# Altium PCB UARTRecorder2.PcbDoc
Units mm, origin at the board's own origin, x right, y up, seen from the top; angles counter-clockwise.
Board outline 152.4 x 101.6 mm, 2 copper layers (Top Layer, Bottom Layer); 66 components, 53 nets, 258 pads, 165 vias.
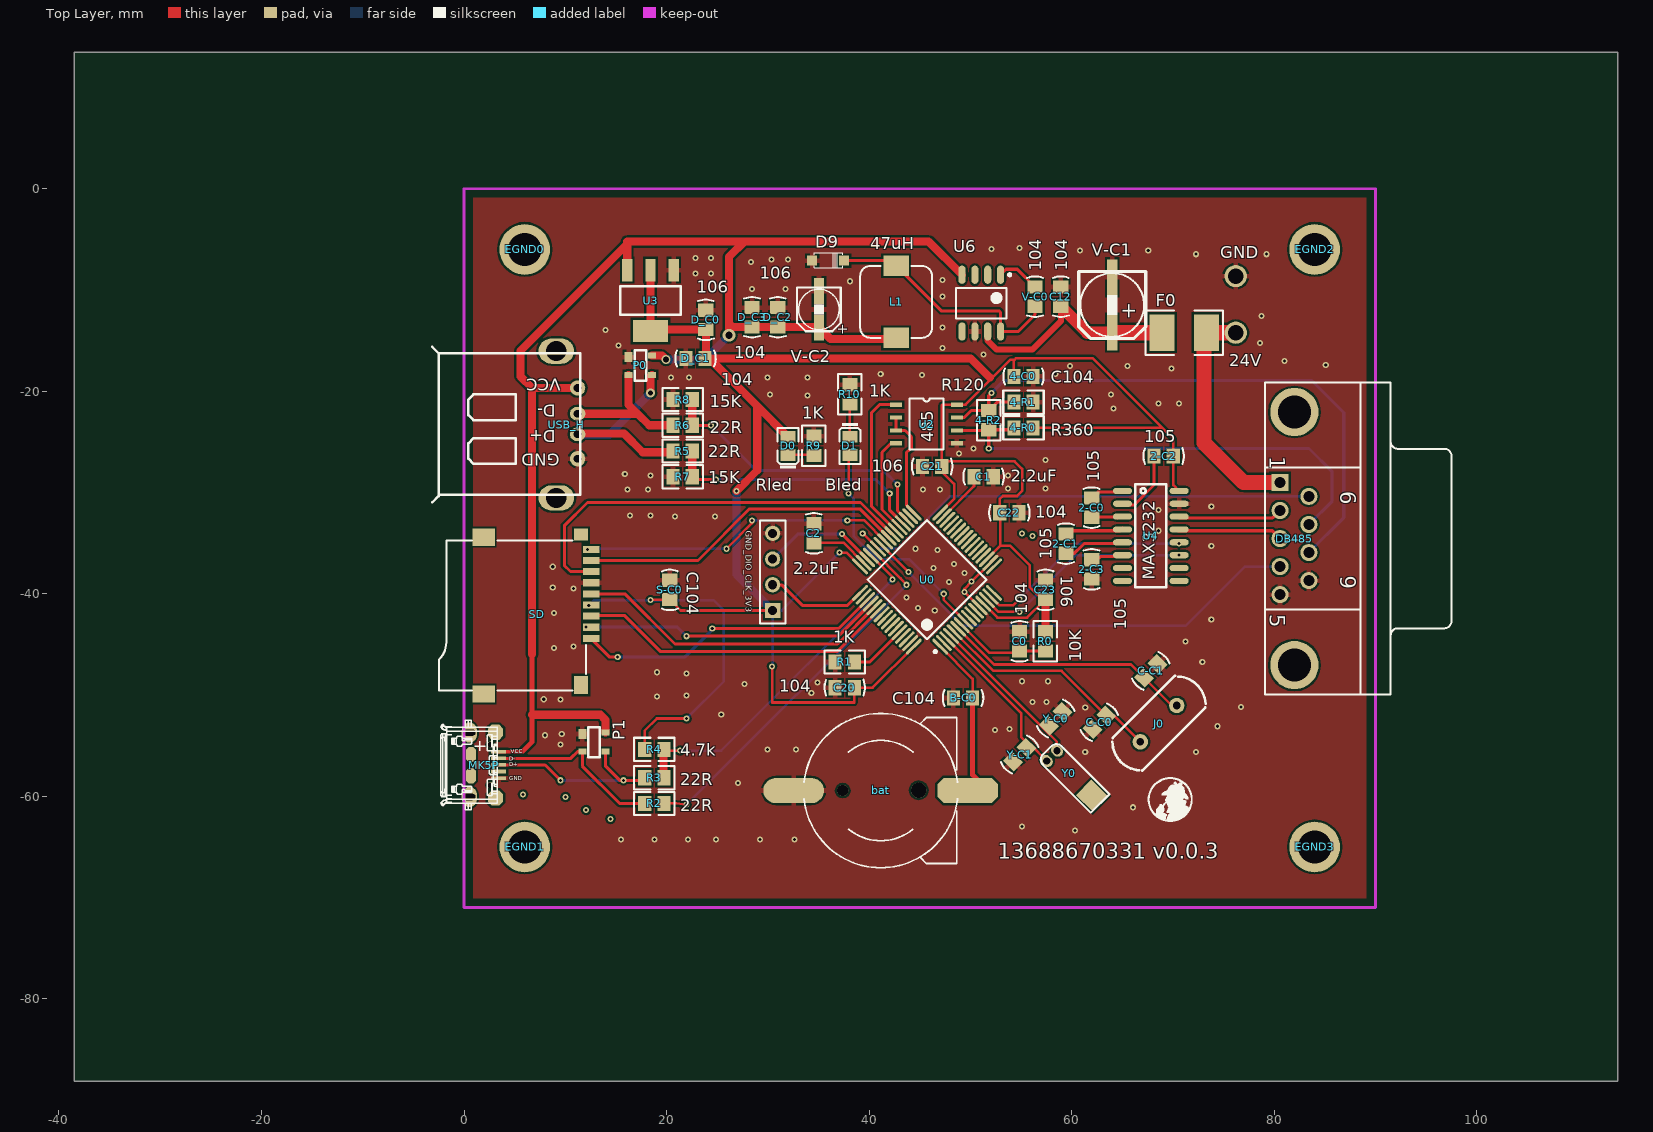
[diagram p0: Top Layer view]
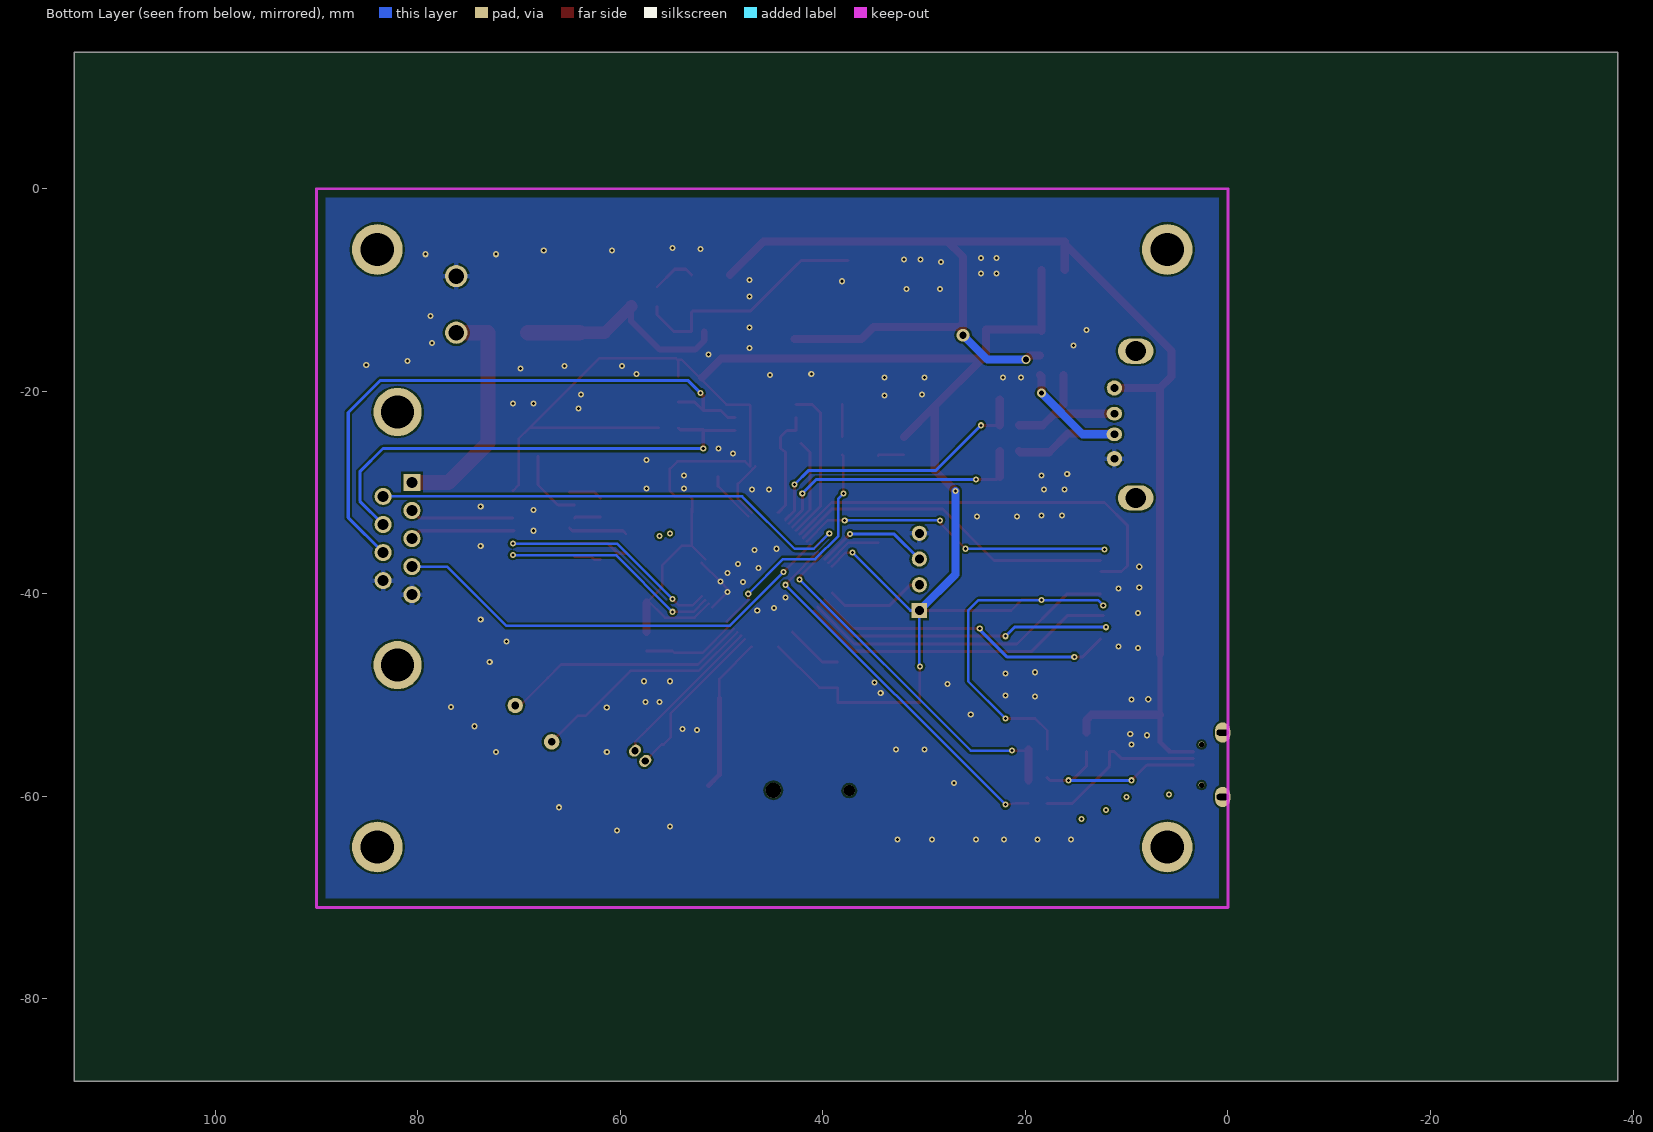
[diagram p1: Bottom Layer view, seen from below]

## Layer stack, top to bottom
Top Layer: signal copper 0.0356
Dielectric: dielectric 0.32, FR-4, Dk 4.8
Bottom Layer: signal copper 0.0356

## Board outline
-38.481,-88.13 113.919,-88.13 113.919,13.47 -38.481,13.47

## Design rules (kind name [scope] priority, off if disabled: settings)
Clearance Clearance_keepout [(OnLayer('Keep-Out Layer'))] p1: gap=0.762
Clearance Clearance_ploy [inpoly] p2: gap=0.203
Clearance [All] p3: gap=0.152
ComponentClearance [All] p1: gap=0.127 collisioncheckmode=3 verticalgap=0.254 showdistances=FALSE
DiffPairsRouting DiffPair_DiffPairsRouting [InDifferentialPair ('VOUT2')] p1: maxlimit=0.254 minlimit=0.254 mostfreqgap=0.254 maxuncoupledlength=12.7
DiffPairsRouting [All] p2: maxlimit=0.254 minlimit=-0.044 mostfreqgap=0.254 toplayer_maxgap=-0.044 toplayer_prefgap=3.693 bottomlayer_maxgap=-0.044 bottomlayer_prefgap=2.348 maxuncoupledlength=12.7
HoleSize [All] p1: absolutevalues=TRUE maxlimit=5 minlimit=0.025 maxpercent=80.000 minpercent=20.000
HoleSize FabricationTestpoint [All] p2: absolutevalues=TRUE maxlimit=2.54 minlimit=0.025 maxpercent=80.000 minpercent=20.000
HoleSize FabricationTestPointUsage [All] p3: absolutevalues=TRUE maxlimit=2.54 minlimit=0.025 maxpercent=80.000 minpercent=20.000
Length [All] p1: maxlimit=152.4 minlimit=0
MatchedLengths DiffPair_MatchedLengths [InDifferentialPair ('VOUT2')] p1: tolerance=25.4 checknetsindiffpair=TRUE checkdiffpairvsdiffpair=TRUE checkothers=TRUE
MinimumSolderMaskSliver [All] p1: minsoldermaskwidth=0
MinimumSolderMaskSliver SilkToSolderMaskClearance [IsPad] p2: minsoldermaskwidth=0.254
NetAntennae AssemblyTestpoint [All] p1: netantennaetolerance=0
NetAntennae [All] p2: netantennaetolerance=0
NetAntennae AssemblyTestPointUsage [All] p3: netantennaetolerance=0
NetAntennae UnpouredPolygon [All] p4: netantennaetolerance=0
NetAntennae SilkToBoardRegionClearance [All] p5: netantennaetolerance=0
PlaneConnect [All] p1: planeconnectstyle=Direct reliefexpansion=0.508 reliefentries=4 reliefconductorwidth=0.254 reliefairgap=0.254
PolygonConnect PolygonConnect_VIA [ISVIA] p1: connectstyle=Direct reliefconductorwidth=0.254 reliefentries=4 polygonreliefangle="90 Angle"
PolygonConnect [All] p2: connectstyle=Relief reliefconductorwidth=0.508 reliefentries=4 polygonreliefangle="90 Angle"
RoutingVias [All] p1: holewidth=0.4 width=0.8 viastyle="Through Hole" minholewidth=0.3 minwidth=0.6 maxholewidth=1 maxwidth=2
SilkToSilkClearance [All] p1: silktosilkclearance=0
SilkscreenOverComponentPads [All] p1: minsilkscreentomaskgap=0
SolderMaskExpansion [All] p1: expansion=0.102
TestPointUsage [All] p1: valid=0 allowmultiple=FALSE
Testpoint [All] p1: side=15 testpointundercomponent=TRUE minsize=1.016 maxsize=2.54 preferedsize=1.524 minholesize=0 maxholesize=1.016 preferedholesize=0.813 testpointgrid=0.025 style=1023 order=0-112345678
Width Width_VCC3.3 [InNet('G+3V3')] p1: maxlimit=20 minlimit=0.305 preferedwidth=0.305
Width DiffPair_Width [InDifferentialPair('VOUT2')] p2: maxlimit=0.254 minlimit=0.254 preferedwidth=0.254
Width [All] p3: maxlimit=2.54 minlimit=0.152 preferedwidth=0.203
16 further rules are at their usual default settings.

## Components (designator, comment, footprint, x,y, rotation, side; value= is the part's Value field where it differs from the comment)
2-C0 "105" C-RAD-0805 61.976,-31.488 r90 top
2-C1 "105" C-RAD-0805 59.436,-35.044 r90 top
2-C2 "105" C-RAD-0805 69.088,-26.408 r180 top
2-C3 "105" C-RAD-0805 61.976,-37.584 r90 top
4-C0 "C104" C-RAD-0805 55.245,-18.534 r180 top
4-R0 "R360" R2012-0805 55.245,-23.614 r180 top
4-R1 "R360" R2012-0805 55.245,-21.074 r180 top
4-R2 "R120" R2012-0805 51.816,-22.852 r90 top
24V "1孔" HOLEX1#1 76.2,-14.216 r0 top (schematic designator k0)
B-C0 "C104" C-RAD-0805 49.276,-50.284 r0 top
bat "Battery" BATM 41.148,-59.428 r90 top
C0 "104" C-RAD-0805 54.864,-44.696 r90 top
C1 "2.2uF" C-RAD-0805 51.308,-28.44 r0 top
C2 "2.2uF" C-RAD-0805 34.544,-34.028 r90 top
C12 "104" C-RAD-0805 58.928,-10.66 r90 top
C20 "104" C-RAD-0805 37.592,-49.268 r0 top
C21 "106" C-RAD-0805 46.228,-27.424 r0 top
C22 "104" C-RAD-0805 53.848,-31.996 r180 top
C23 "106" C-RAD-0805 57.404,-39.616 r270 top
C-C0 "22pF" C-RAD-0805 62.738,-52.697 r45 top
C-C1 "22pF" C-RAD-0805 67.818,-47.617 r225 top
D0 "Rled" 0805_LED_S1 32.004,-25.392 r90 top
D1 "Bled" 0805_LED_S1 38.1,-25.392 r270 top
D9 "S7" SOD123 36.576,-7.104 r0 top
D_C0 "106" C-RAD-0805 23.876,-12.946 r270 top
D_C1 "104" C-RAD-0805 22.86,-16.756 r0 top
D_C2 "106" C-RAD-0805 30.988,-12.692 r90 top
D_C3 "104" C-RAD-0805 28.448,-12.692 r90 top
DB485 "DB9母座" DB9-F 91.5,-34.544 r270 top
EGND0 "1孔" HOLEX1#2 6,-6 r90 top
EGND1 "1孔" HOLEX1#3 5.588,-62.857 r90 top
EGND2 "1孔" HOLEX1#2 84,-6 r90 top
EGND3 "1孔" HOLEX1#4 82.548,-62.857 r90 top
F0 "Fuse 1" 1812 71.12,-14.216 r180 top
GND "1孔" HOLEX1#1 76.2,-8.628 r0 top (schematic designator k1)
GND_DIO_CLK_3V3 "Header 4" HDR1X4 30.48,-41.648 r90 top
J0 "25M" 晶振HC-49S 68.58,-52.824 r225 top
L1 "47uH" L-SMD-7 42.672,-11.168 r270 top
MK5P "五脚端子" USB-MICRO1 3.072,-56.896 r90 top
P0 "PRTR5V0U2X" SOT-143 16.256,-16.629 r270 top
P1 "PRTR5V0U2X" SOT-143 11.684,-53.84 r270 top
R0 "10K" R2012-0805 57.404,-44.696 r270 top
R1 "1K" R2012-0805 37.592,-46.728 r180 top
R2 "22R" R2012-0805 18.796,-60.698 r180 top
R3 "22R" R2012-0805 18.796,-58.158 r180 top
R4 "4.7k" R2012-0805 18.796,-55.364 r180 top
R5 "22R" R2012-0805 21.59,-25.9 r180 top
R6 "22R" R2012-0805 21.59,-23.36 r180 top
R7 "15K" R2012-0805 21.59,-28.44 r180 top
R8 "15K" R2012-0805 21.59,-20.82 r180 top
R9 "1K" R2012-0805 34.544,-25.392 r270 top
R10 "1K" R2012-0805 38.1,-20.312 r270 top
S-C0 "C104" C-RAD-0805 20.32,-39.616 r90 top
SD "microSD" SDCARD-M 1.548,-42.156 r180 top locked
U0 "STM32F205RBT6" LQFP-64 45.72,-38.6 r135 top
U2 "485" SOP8 42.672,-21.328 r0 top
U3 "AMS1117-3.3" ? 18.415,-11.041 r90 top
U4 "MAX3232" SOP-16 65.024,-29.837 r270 top
U6 "LM2675M-5.0" "SOP8 - 3D" 51.054,-11.295 r270 top
USB_H "五脚端子" USB 11.216,-19.677 r180 top
V-C0 "104" C-RAD-0805 56.388,-10.66 r270 top
V-C1 "100uF/37V" SMD-EC-F6.3 64.008,-14.216 r90 top
V-C2 "47uF/37v" SMD-EC-F4 35.052,-13.708 r90 top
Y0 "32.768M" XTAL32 58.547,-55.491 r315 top
Y-C0 "20pF" C-RAD-0805 58.42,-52.316 r225 top
Y-C1 "20pF" C-RAD-0805 54.864,-55.872 r45 top

## Footprints (in the part's own frame and the unit in brackets; to place one, negate y for a bottom-side part, rotate by r counter-clockwise, add the part's x,y. Pads: shape width x height; smd on the part's side, far side on the other; paste and mask are expansions set on the pad)
0805_LED_S1 [mm]
  rect 1.16x1.47 smd: A(0.89,0) K(-0.89,0)
  silkscreen extent -2.24,-1.04 1.77,1.03, body extent -1.01,-0.62 1.01,0.62, height 1.1
1812 [mm] "保险丝"
  rect 2.5x3.6 smd: 1(-2.2,0) 2(2.2,0)
  silkscreen extent -3.81,-2.2 3.81,2.2, body extent -2.54,-1.65 2.67,1.65, height 1.2
BATM [mm]
  round 1.1 hole 1.1 unplated: 0(0,3.748)
  round 1.5 hole 1.5 unplated: 0(0.025,-3.752)
  oct 2.5x6 smd: 1(0,-8.602)
  oval 2.5x6 smd: 2(0,8.598)
  silkscreen extent -7.62,-7.58 7.62,7.57
C-RAD-0805 [mm] "贴片电容"
  rect 1.3x1.5 smd: 1(-0.95,0) 2(0.95,0)
  silkscreen extent -2,-0.79 2,0.79, body extent -1.27,-0.64 1.27,0.64, height 0.9
DB9-F [mm] "DB9母座"
  rect 1.69x1.69 hole 1.09: 1(-5.54,-10.92)
  round 1.69 hole 1.09: 2(-2.77,-10.92) 3(0,-10.92) 4(2.77,-10.92) 5(5.54,-10.92) 6(-4.155,-8.08) 7(-1.385,-8.08) 8(1.385,-8.08) 9(4.155,-8.08)
  round 4.76 hole 3.26: 10(-12.495,-9.5) 11(12.495,-9.5)
  silkscreen extent -15.4,-12.4 15.4,6
HDR1X4 [mm] "Connector; Header; 4 Position"
  rect 1.5x1.5 hole 0.9: 1(0,0)
  round 1.5 hole 0.9: 2(2.54,0) 3(5.08,0) 4(7.62,0)
  silkscreen extent -1.27,-1.27 8.89,1.27
HOLEX1#1 [mm]
  round 2.2 hole 1.524: 1(0,0)
HOLEX1#2 [mm]
  round 5 hole 3.3: 1(0,0)
HOLEX1#3 [mm]
  round 5 hole 3.3: 1(-2.143,-0.412)
HOLEX1#4 [mm]
  round 5 hole 3.3: 1(-2.143,-1.452)
L-SMD-7 [mm] "贴片电感7*7"
  rect 2x2.5 smd: 1(-3.556,0) 2(3.556,0)
  silkscreen extent -3.56,-3.56 3.56,3.56, body extent -3.56,-3.56 3.56,3.56, height 4
LQFP-64 [mm] "LQFP64"
  oval 2.1x0.3 smd: 1(-5.6,3.75) 2(-5.6,3.25) 3(-5.6,2.75) 4(-5.6,2.25) 5(-5.6,1.75) 6(-5.6,1.25) 7(-5.6,0.75) 8(-5.6,0.25) 9(-5.6,-0.25) 10(-5.6,-0.75) 11(-5.6,-1.25) 12(-5.6,-1.75) 13(-5.6,-2.25) 14(-5.6,-2.75) 15(-5.6,-3.25) 16(-5.6,-3.75) 33(5.6,-3.75) 34(5.6,-3.25) 35(5.6,-2.75) 36(5.6,-2.25) 37(5.6,-1.75) 38(5.6,-1.25) 39(5.6,-0.75) 40(5.6,-0.25) 41(5.6,0.25) 42(5.6,0.75) 43(5.6,1.25) 44(5.6,1.75) 45(5.6,2.25) 46(5.6,2.75) 47(5.6,3.25) 48(5.6,3.75)
  oval 0.3x2.1 smd: 17(-3.75,-5.6) 18(-3.25,-5.6) 19(-2.75,-5.6) 20(-2.25,-5.6) 21(-1.75,-5.6) 22(-1.25,-5.6) 23(-0.75,-5.6) 24(-0.25,-5.6) 25(0.25,-5.6) 26(0.75,-5.6) 27(1.25,-5.6) 28(1.75,-5.6) 29(2.25,-5.6) 30(2.75,-5.6) 31(3.25,-5.6) 32(3.75,-5.6) 49(3.75,5.6) 50(3.25,5.6) 51(2.75,5.6) 52(2.25,5.6) 53(1.75,5.6) 54(1.25,5.6) 55(0.75,5.6) 56(0.25,5.6) 57(-0.25,5.6) 58(-0.75,5.6) 59(-1.25,5.6) 60(-1.75,5.6) 61(-2.25,5.6) 62(-2.75,5.6) 63(-3.25,5.6) 64(-3.75,5.6)
  silkscreen extent -5.72,-4.15 4.15,4.57, body extent -5,-5 5,5, height 1.6
R2012-0805 [mm] "Thermistor; 2 Leads"
  rect 1.3x1.5 smd: 1(-0.95,0) 2(0.95,0)
  silkscreen extent -2,-1.15 2,1.15, body extent -1.02,-0.64 0.98,0.62
SDCARD-M [mm] "TF卡"
  rect 1.6x0.7 smd: 1(-11.008,2.25) 2(-11.008,1.15) 3(-11.008,0.05) 4(-11.008,-1.05) 5(-11.008,-2.15) 6(-11.008,-3.25) 7(-11.008,-4.35) 8(-11.008,-5.45) 9(-11.008,-6.55)
  rect 1.4x1.2 smd: 10(-10,-8.004)
  rect 2.2x1.7 smd: 11(-0.4,-7.75) 13(-0.4,7.75)
  rect 1.4x1.8 smd: 12(-10,6.85)
  silkscreen extent -10.5,-7.4 4,7.4
SMD-EC-F4 [mm]
  rect 2.6x1 smd: 1(0,0) 2(3.579,0)
  silkscreen extent -0.36,-2.15 3.94,2.15
SMD-EC-F6.3 [mm]
  rect 3.5x1 smd: 1(0,0) 2(5.475,0)
  silkscreen extent -0.56,-3.31 6.04,3.31
SOD123 [mm] "Chip Capacitor; Body 2.0 x 1.2 mm (LxW typ)"
  rect 1x1 smd: 1(-2.2,0) 2(0.95,0)
  silkscreen extent -2,-0.7 0.8,0.8
SOP8 [mm]
  rect 1.2x0.42 smd: 1(0,0) 2(0,-1.27) 3(0,-2.54) 4(0,-3.81) 5(6,-3.81) 6(6,-2.54) 7(6,-1.27) 8(6,0)
  silkscreen extent 1.33,-4.44 4.67,0.64
"SOP8 - 3D" [mm]
  oval 1.8x0.7 smd: 1(-2.8,1.93) 2(-2.8,0.66) 3(-2.8,-0.61) 4(-2.8,-1.88) 5(2.8,-1.88) 6(2.8,-0.61) 7(2.8,0.66) 8(2.8,1.93)
  silkscreen extent -2.92,-2.48 1.5,2.96, body extent -3.02,-2.51 3.02,2.51, height 1.6
SOP-16 [mil]
  oval 24x74 smd: 1(0,0) 2(50,0) 3(100,0) 4(150,0) 5(200,0) 6(250,0) 7(300,0) 8(350,0) 9(350,220) 10(300,220) 11(250,220) 12(200,220) 13(150,220) 14(100,220) 15(50,220) 16(0,220)
  silkscreen extent -25,50 375,170, body extent -19,-5 367,223, height 69
SOT-143 [mm]
  rect 1x0.8 smd: 1(0,0)
  rect 0.6x0.8 smd: 2(1.75,0) 3(1.75,2.3) 4(-0.15,2.3)
  silkscreen extent -0.68,0.58 2.32,1.73, body extent -0.66,-0.06 2.26,2.36, height 1
USB [mil]
  round 60 hole 30: 1(0,0) 4(0,275)
  oval 60x52.13 hole 30: 2(0,100) 3(0,180)
  oval 137.79x98.42 hole 78.74: VSS(82.68,427.44) VSS2(82.68,-143.43)
  silkscreen extent -10,-160 565,445, body extent -16,-173 539,449, height 250
USB-MICRO1 [mm] "USB AF/10.0 4P母座卷边SMT(前插后贴) H=6.8mm"
  rect 0.35x1.5 smd: 1(-1.3,-0.33) 2(-0.65,-0.33) 3(0,-0.33) 4(0.65,-0.33) 5(1.3,-0.33)
  oct 1.5x1.5 smd: ""(-3.275,-0.025) ""(3.225,-0.025)
  oval 2x1.5 hole 0.6 slot 1.2 at 90 deg: ""(-3.165,2.545) ""(3.195,2.545)
  oct 1.5x1 smd: ""(-1.075,2.375) ""(1.025,2.375)
  silkscreen extent -4.41,-0.23 4.4,5.39
XTAL32 [mil]
  oval 50x40 hole 28: 1(0,0) 2(0,-56)
  rect 92.13x86 smd: ""(220,-27)
  silkscreen extent -28,-77 264,25
晶振HC-49S [mil]
  round 60 hole 30: 1(100,0) 2(-100,0)
  silkscreen extent -212,-87 209,84, body extent -223,-93 223,90, height 138
? [mm]
  rect 2.2x1 smd: 1(3,-2.3) 2(3,0) 3(3,2.3)
  rect 2.2x3.5 smd: 2(-3,0)
  silkscreen extent -1.4,-3 1.4,3, body extent -3.49,-3.24 3.49,3.24, height 1.64

## Part data
2-C0 2-C1 2-C2 2-C3: library part "0805 1uF (105) 10% 50V", "贴片电容"
4-C0 B-C0 S-C0: library part "Cap Semi", "Capacitor (Semiconductor SIM Model)"
4-R0 4-R1 4-R2: library part Res3, "Resistor"
bat: "Multicell Battery"
C0 D_C0 D_C1 D_C2 D_C3 V-C0: library part "0805 100nF(104) 10% 50V", "贴片电容"
C1 C2: library part "0805 2.2uF (225) 20% 50V", "贴片电容"
C12 C20 C21 C22 C23: library part Cap, "Capacitor"
C-C0 C-C1: library part "0603 22pF (220) 5% 50V", "贴片电容"
D0: library part "0805 红灯", "发光二极管"
D1: library part "0805 蓝灯", "发光二极管"
D9: library part "D Schottky", "Schottky Diode"
DB485: library part 9脚封装DB9
F0: "Fuse"
GND_DIO_CLK_3V3: "Header, 4-Pin"
J0: library part 晶振
L1: library part Lnductor
R0 R2 R3 R4 R5 R6 R7 R8 R9 R10: library part "0805 1KΩ (1001) 1%", "贴片电阻"
R1: library part "0603 1KΩ (1001) 1%", "贴片电阻"
U0: "ARM Cortex-M3 32-bit MCU, 128 KB Flash, 64 KB Internal RAM, 51 I/Os, 64-pin LQFP, -40 to 85 degC, Tray"
U2: library part SP3485
U3: library part "SOT-223 AMS1117-3.3", "低压差线性稳压(LDO)"
U6: library part TPS5410
V-C1 V-C2: library part "Cap Pol3", "Polarized Capacitor (Surface Mount)"
Y0: library part XTAL, "Crystal Oscillator"
Y-C0 Y-C1: library part "0805 20pF (200) 5% 50V", "贴片电容"

## Via types
v1: diameter 0.6, hole 0.3, Top Layer to Bottom Layer, 160 vias
v2: diameter 0.6, hole 0.55, Top Layer to Bottom Layer, 2 vias
v3: diameter 0.9, hole 0.6, Top Layer to Bottom Layer, 1 vias
v4: diameter 0.9, hole 0.5, Top Layer to Bottom Layer, 1 vias
v5: diameter 1.27, hole 0.711, Top Layer to Bottom Layer, 1 vias

## Nets (pads, with @x,y where several pads share a name; then routed paths per layer and width w, separated by ;. In a path a pad name is that pad's centre, name@x,y a point inside that pad or via, vN(x,y) a via of type N, cw(c..) or ccw(c..) an arc to the next point about the centre after c; other vN are vias at no path point)
BAT: B-C0.2 bat.1 U0.1 | length 15.5
  Top Layer w0.254: U0.1 50.226,-48.409 B-C0.2
  Top Layer w0.5: B-C0.2 50.226,-57.872 50.766,-58.412 bat.1@51.274,-58.92
GND: 2-C3.1 4-C0.1 4-R1.1 B-C0.1 bat.2 C0.2 C1.2 C2.2 C12.2 C20.1 C21.1 C22.1 C23.1 C-C0.1 C-C1.1 D9.1 D_C0.1 D_C1.1 D_C2.2 D_C3.2 DB485.5 DB485.9 GND.1 GND_DIO_CLK_3V3.4 MK5P.1 P0.1 P1.1 R1.2 R7.2 R8.2 R9.1 R10.1 S-C0.2 SD.6 U0.12 U0.18 U0.63 U2.5 U3.1 U4.15 U6.6 USB_H.4 V-C1.2 V-C2.2 Y-C0.1 Y-C1.1 | length 6.1
  Top Layer w0.254: U0.12 v1(49.403,-39.808) 49.403,-39.513 v1(50.126,-38.79) U0.18
  other v1: 15.494,-64.254 18.796,-64.254 22.098,-64.254 24.892,-64.254 29.21,-64.254 32.639,-64.254 60.325,-63.365 55.118,-62.984 66.04,-61.079 27.051,-58.666 61.341,-55.618 72.263,-55.618 29.972,-55.364 32.766,-55.364 9.525,-54.864 8.001,-53.967 9.652,-53.848 52.451,-53.459 53.848,-53.332 74.422,-53.078 25.4,-51.935 61.343,-51.229 76.708,-51.173 56.134,-50.665 57.531,-50.665 7.874,-50.411 9.525,-50.419 19.05,-50.157 21.971,-50.03 34.29,-49.776 27.686,-48.887 34.925,-48.76 55.118,-48.633 57.658,-48.633 21.971,-47.871 19.05,-47.744 72.898,-46.728 8.89,-45.331 10.795,-45.204 71.247,-44.696 73.787,-42.537 8.89,-41.902 46.482,-41.648 44.831,-41.394 43.688,-40.378 10.795,-39.489 8.763,-39.362 47.879,-38.854 49.403,-37.965 46.355,-37.457 8.763,-37.33 48.387,-37.076 46.736,-35.679 44.577,-35.552 73.787,-35.298 68.58,-33.774 20.828,-32.377 24.765,-32.377 16.383,-32.25 18.415,-32.25 68.58,-31.742 73.787,-31.361 16.129,-29.71 18.161,-29.71 45.339,-29.71 46.99,-29.71 53.721,-29.583 57.404,-29.583 18.415,-28.313 53.721,-28.313 15.875,-28.186 57.404,-26.789 48.895,-26.154 50.292,-25.646 64.135,-21.709 68.58,-21.201 70.612,-21.201 33.909,-20.439 30.226,-20.312 63.881,-20.312 20.447,-18.661 22.225,-18.661 29.972,-18.661 33.909,-18.661 45.212,-18.407 41.148,-18.28 58.42,-18.28 69.85,-17.772 59.817,-17.518 65.532,-17.518 85.09,-17.391 81.026,-17.01 51.308,-16.375 47.244,-15.74 15.24,-15.486 78.613,-15.232 13.97,-13.962 47.244,-13.708 78.74,-12.565 47.244,-10.66 28.448,-9.898 31.75,-9.898 38.1,-9.136 47.244,-9.009 22.86,-8.374 24.384,-8.374 28.321,-7.231 30.353,-6.977 32.004,-6.977 22.86,-6.85 24.384,-6.85 72.263,-6.469 79.248,-6.469 60.833,-6.088 67.564,-6.088 52.07,-5.961 54.864,-5.834
IO2: P0.2 R6.2 USB_H.2 | length 14.1
  Top Layer w0.8: USB_H.2 17.145,-22.217 ; P0.2 16.256,-21.328 17.145,-22.217 ; R6.2 18.288,-23.36 17.145,-22.217
IO3: P0.3 R5.2 USB_H.3 | length 21.1
  Top Layer w0.8: USB_H.3@11.216,-24.175 15.801,-24.175 17.653,-26.027 20.513,-26.027 R5.2 ; v4@18.372,-20.142 v4(18.415,-20.185) 18.415,-18.52 P0.3
  Bottom Layer w0.8: USB_H.3 14.351,-24.249 v4(18.415,-20.185)
IO4: MK5P.4 P1.2 R2.2 | length 17.7
  Top Layer w0.3: MK5P.4 10.541,-56.246 11.197,-55.59 P1.2 11.684,-57.015 15.367,-60.698 R2.2
IO5: MK5P.3 P1.3 R3.2 | length 19
  Top Layer w0.3: MK5P.3 8.009,-56.896 v1(9.525,-58.412) ; P1.3 13.984,-57.029 15.367,-58.412 v1(15.748,-58.412) 17.592,-58.412 R3.2
  Bottom Layer w0.3: v1(9.525,-58.412) v1(15.748,-58.412)
LED: D1.A U0.8 | length 23.1
  Top Layer w0.254: v1(37.973,-30.091) 37.973,-26.409 D1.A ; v1(47.371,-39.997) 47.371,-40.605 U0.8
  Bottom Layer w0.254: v1(37.973,-30.091) 38.481,-30.599 38.481,-34.282 40.767,-36.568 43.942,-36.568 v1(47.371,-39.997)
Net2-C0_1: 2-C0.1 U4.3 | length 2.6
  Top Layer w0.3: 2-C0.1 64.45,-32.438 U4.3@64.516,-32.504
Net2-C0_2: 2-C0.2 U4.1 | length 3.3
  Top Layer w0.3: 2-C0.2 62.55,-29.964 U4.1@65.024,-29.964
Net2-C1_1: 2-C1.1 U4.5 | length 5.9
  Top Layer w0.3: 2-C1.1 60.264,-35.994 61.214,-35.044 U4.5@64.897,-35.044
Net2-C1_2: 2-C1.2 U4.4 | length 5.8
  Top Layer w0.3: 2-C1.2 59.756,-33.774 64.77,-33.774 64.96,-33.583 U4.4@65.024,-33.52
Net2-C2_2: 2-C2.2 U4.2 | length 7.3
  Top Layer w0.3: U4.2@64.516,-31.234 65.024,-31.234 66.167,-31.234 68.138,-29.263 2-C2.2
Net2-C3_2: 2-C3.2 U4.6 | length 2.7
  Top Layer w0.3: 2-C3.2 62.545,-36.634 62.865,-36.314 U4.6@64.516,-36.314
NetC1_1: C1.1 U0.31 | length 5.1
  Top Layer w0.254: U0.31 50.358,-29.366 C1.1
NetC2_1: C2.1 U0.47 | length 5.7
  Top Layer w0.254: C2.1 37.502,-34.978 U0.47
NetD0_K: D0.K R9.2 | length 2.6
  Top Layer w0.254: D0.K 34.484,-26.282 R9.2
NetD1_K: D1.K R10.2 | length 3.2
  Top Layer w0.254: D1.K R10.2
NetD9_2: D9.2 L1.1 U6.8 V-C0.2 | length 24.4
  Top Layer w0.3: D9.2 42.164,-7.104 L1.1 47.117,-12.057 52.832,-12.057 52.984,-12.209 U6.8 54.731,-14.095 56.388,-12.438 V-C0.2
NetR1_1: R1.1 U0.60 | length 5.7
  Top Layer w0.3: R1.1 40.067,-46.728 U0.60
NetU6_1: U6.1 V-C0.1 | length 4.4
  Top Layer w0.3: U6.1 53.525,-7.954 54.632,-7.954 V-C0.1
NRST: C0.1 R0.2 U0.7 | length 9.5
  Top Layer w0.254: U0.7 51.898,-45.839 54.671,-45.839 C0.1 R0.2
OSC32_IN: U0.3 Y0.2 Y-C1.2 | length 16.2
  Top Layer w0.254: U0.3 55.028,-51.797 55.028,-54.184 55.726,-54.883 55.927,-54.883 Y0.2
OSC32_OUT: U0.4 Y0.1 Y-C0.2 | length 15.7
  Top Layer w0.254: U0.4 57.337,-53.399 58.547,-54.609 Y0.1
OSC_IN: C-C0.2 J0.1 U0.5 | length 22.8
  Top Layer w0.254: U0.5 52.262,-47.617 59.002,-47.617 C-C0.2 64.189,-52.025 J0.1
OSC_OUT: C-C1.2 J0.2 U0.6 | length 24.7
  Top Layer w0.254: U0.6 52.334,-46.982 65.839,-46.982 C-C1.2 69.885,-51.028 J0.2
RS232_RX: DB485.3 U4.13 | length 10.4
  Top Layer w0.3: U4.13@70.485,-33.774 70.612,-33.774 79.81,-33.774 DB485.3
RS232_TX: DB485.2 U4.14 | length 10.3
  Top Layer w0.3: U4.14@70.612,-32.504 79.85,-32.504 DB485.2
RS485_A: 4-R0.2 4-R2.1 DB485.7 U2.6 | length 48.6
  Top Layer w0.3: U2.6 51.75,-23.868 4-R2.1 ; v1(51.816,-25.646) 4-R2.1 ; 4-R0.2 54.107,-23.802 4-R2.1
  Bottom Layer w0.3: v1(51.816,-25.646) 83.431,-25.646 85.725,-27.94 85.725,-30.854 DB485.7
RS485_B: 4-R1.2 4-R2.2 DB485.8 U2.7 | length 60
  Top Layer w0.3: U2.7 49.403,-22.598 50.099,-21.902 4-R2.2 ; v1(52.07,-20.185) 51.816,-20.439 4-R2.2 ; 4-R1.2 52.644,-21.074 4-R2.2
  Bottom Layer w0.3: v1(52.07,-20.185) 53.34,-18.915 83.685,-18.915 86.868,-22.098 86.868,-32.481 DB485.8
RS485_RE: U0.33 U2.2 U2.3 | length 11.1
  Top Layer w0.3: U2.2 U2.3 43.561,-23.868 44.196,-24.503 44.196,-25.646 43.688,-26.027 43.688,-31.265 U0.33
SD_CK: SD.5 U0.53 | length 31.5
  Top Layer w0.3: SD.5@12.573,-40.005 15.883,-40.005 20.828,-44.95 36.895,-44.95 U0.53
SD_CMD: SD.3 U0.54 | length 31.7
  Top Layer w0.3: SD.3@12.319,-42.164 12.556,-42.164 15.875,-42.164 19.423,-45.712 35.828,-45.712 35.866,-45.674 36.878,-45.674 U0.54
SD_D0: SD.7 U0.39 | length 41.5
  Top Layer w0.3: SD.7 10.509,-37.806 9.906,-37.203 9.906,-33.274 12.2,-30.98 39.161,-30.98 U0.39
SD_D1: SD.8 U0.40 | length 32.7
  Top Layer w0.3: SD.8@12.573,-36.706 23.103,-36.706 28.194,-31.615 39.089,-31.615 U0.40 U0.40@41.96,-34.486
SD_D2: SD.1 U0.51 | length 30.4
  Top Layer w0.3: SD.1@12.573,-44.45 14.343,-46.22 v1(15.179,-46.22) ; v1(24.511,-43.426) 37.005,-43.426 U0.51
  Bottom Layer w0.3: v1(15.179,-46.22) 21.844,-46.22 24.511,-43.553 v1(24.511,-43.426)
SD_D3: SD.2 U0.52 | length 30.3
  Top Layer w0.3: v1(12.065,-43.299) SD.2@12.556,-43.299 ; v1(21.971,-44.188) 36.95,-44.188 U0.52
  Bottom Layer w0.3: v1(12.065,-43.299) 21.082,-43.299 v1(21.971,-44.188)
SD_EXTI: SD.9 U0.41 | length 32.1
  Top Layer w0.254: v1(12.192,-35.606) SD.9 ; v1(25.908,-35.552) 28.448,-33.012 v1(28.448,-32.758) ; v1(37.846,-32.758) 39.524,-32.758 U0.41
  Bottom Layer w0.254: v1(12.192,-35.606) 12.246,-35.552 v1(25.908,-35.552) v1@26.035,-35.425 ; v1(28.448,-32.758) v1(37.846,-32.758)
SW_CLK: GND_DIO_CLK_3V3.2 U0.49 | length 10
  Top Layer w0.3: GND_DIO_CLK_3V3.2 31.369,-39.108 33.401,-41.14 37.877,-41.14 U0.49
SWDIO: GND_DIO_CLK_3V3.3 U0.46 | length 11.4
  Top Layer w0.3: v1(37.338,-34.107) U0.46
  Bottom Layer w0.3: GND_DIO_CLK_3V3.3 32.941,-34.107 v1(37.338,-34.107)
UART1_RX: DB485.6 U0.43 | length 48.9
  Top Layer w0.254: v1(39.37,-34.028) 39.38,-34.028 U0.43
  Bottom Layer w0.254: v1@39.439,-34.086 40.904,-35.552 42.799,-35.552 47.97,-30.381 DB485.6@83.42,-30.381
UART1_TX: DB485.4 U0.42 | length 45.1
  Top Layer w0.254: U0.42 v1(43.897,-37.838)
  Bottom Layer w0.254: v1(43.897,-37.838) 49.231,-43.172 71.247,-43.172 77.105,-37.314 DB485.4
UART4_RX: U0.15 U4.12 | length 21.5
  Top Layer w0.254: U0.15 52.856,-41.14 54.229,-41.14 v1(54.864,-40.505)
  Bottom Layer w0.254: v1(54.864,-40.505) 60.325,-35.044 v1(70.612,-35.044)
UART4_TX: U0.14 U4.11 | length 22
  Top Layer w0.254: U0.14 52.784,-41.775 v1(54.864,-41.775) ; v1(70.612,-36.187) U4.11@70.739,-36.314
  Bottom Layer w0.254: v1(54.864,-41.775) 60.452,-36.187 v1(70.612,-36.187)
UART6_RX: U0.38 U2.1 | length 15.4
  Top Layer w0.3: U0.38 40.259,-31.371 40.259,-22.09 41.021,-21.328 U2.1
UART6_TX: U0.37 U2.4 | length 9.3
  Top Layer w0.3: U2.4@42.164,-25.138 41.275,-26.027 41.275,-31.68 U0.37
USB_D+: R3.1 R4.1 U0.45 | length 35.9
  Top Layer w0.254: R4.1 19.873,-55.491 v1(21.336,-55.491) ; U0.45 42.291,-38.353 v1(42.291,-38.6)
  Top Layer w0.8: R3.1@19.685,-58.412 19.685,-58.158 R4.1@19.685,-55.364
  Bottom Layer w0.254: v1(21.336,-55.491) 25.4,-55.491 v1(42.291,-38.6)
USB_D-: R2.1 U0.44 | length 37.5
  Top Layer w0.254: R2.1 20.955,-60.698 v1(21.971,-60.825) ; U0.44 43.118,-38.473 v1(43.688,-39.108)
  Bottom Layer w0.254: v1(21.971,-60.825) v1(43.688,-39.108)
USB_HD+: R5.1 R7.1 U0.36 | length 25.9
  Top Layer w0.3: R7.1@22.794,-28.694 v1(24.892,-28.694) ; v1(42.037,-30.091) 42.037,-31.735 U0.36
  Top Layer w0.8: R7.1 R5.1
  Bottom Layer w0.3: v1(24.892,-28.694) 40.64,-28.694 v1(42.037,-30.091)
USB_HD-: R6.1 R8.1 U0.35 | length 29.1
  Top Layer w0.3: R6.1 v1(24.384,-23.36) ; v1(42.799,-29.202) 42.799,-31.79 U0.35
  Top Layer w0.8: R6.1 R8.1
  Bottom Layer w0.3: v1(24.384,-23.36) 28.829,-27.805 41.402,-27.805 v1(42.799,-29.202)
VCC-24V: 24V.1 DB485.1 F0.1 | length 23.1
  Top Layer w1.5: 24V.1 F0.1 73.07,-14.216 73.07,-25.102 76.972,-29.004 DB485.1
VCC_3.3V: 2-C2.1 4-C0.2 4-R0.1 C20.2 C21.2 C22.2 C23.2 D0.A D_C0.2 D_C1.2 GND_DIO_CLK_3V3.1 R0.1 R4.2 S-C0.1 SD.4 U0.13 U0.19 U0.32 U0.48 U0.64 U2.8 U3.2 U4.16 | length 258.2
  Top Layer w0.254: v1(12.319,-41.14) 12.353,-41.106 SD.4 ; R4.2 17.846,-53.52 19.05,-52.316 v1(21.971,-52.316) ; v1(18.415,-40.632) 18.481,-40.566 S-C0.1 21.402,-41.648 GND_DIO_CLK_3V3.1 ; v1(30.419,-47.17) 30.419,-50.731 38.542,-50.731 C20.2 40.355,-49.268 U0.64 ; v1(37.084,-35.933) 37.75,-35.933 U0.48 ; C21.2@46.67,-27.424 46.924,-27.678 48.387,-29.141 48.387,-30.63 U0.32 ; U0.13 52.658,-42.356 55.614,-42.356 C23.2@57.244,-40.726 ; U0.19 52.959,-35.25 ; C22.2 52.898,-30.66 53.213,-30.345 54.61,-30.345 55.118,-29.837 55.118,-27.678 54.356,-26.916 47.686,-26.916 C21.2 47.178,-21.389 47.239,-21.328 U2.8 49.53,-21.328 53.975,-16.883 54.356,-16.883 ; C22.2@52.959,-31.615 52.959,-31.996 52.959,-35.25 ; 4-C0.2 54.295,-16.944 54.356,-16.883 ; 4-R0.1 68.961,-23.614 ; C23.2@57.404,-40.886 C23.2@57.244,-40.726 ; C23.2 C23.2@57.244,-40.726 ; U4.16 70.038,-29.263 2-C2.1 70.038,-24.691 68.961,-23.614 ; 52.959,-35.25 53.927,-35.25 55.88,-37.203 55.88,-39.362 C23.2@57.244,-40.726 ; 54.356,-16.883 54.483,-16.756 62.103,-16.756 68.961,-23.614
  Top Layer w0.8: U3.2@18.415,-8.041 18.415,-14.041 18.56,-13.896 D_C0.2 23.876,-16.69 D_C1.2 D_C1.2@24.258,-16.756 ; v1(26.924,-29.837) 28.957,-27.804 28.957,-21.455 ; D0.A 28.957,-21.455 ; 51.943,-18.661 50.038,-16.756 D_C1.2@24.258,-16.756 ; R0.1 C23.2@57.404,-40.886 ; D_C1.2@24.258,-16.756 28.957,-21.455
  Bottom Layer w0.254: v1(12.319,-41.14) 12.827,-40.632 v1(18.415,-40.632) 24.638,-40.632 25.654,-41.648 25.654,-48.633 v1(21.971,-52.316) ; v1(30.419,-47.17) 30.48,-47.109 GND_DIO_CLK_3V3.1 31.369,-41.648 v1(37.084,-35.933)
  Bottom Layer w0.8: v1(26.924,-29.837) 26.924,-38.092 GND_DIO_CLK_3V3.1
VCC_5V: D_C2.1 D_C3.1 L1.2 MK5P.5 P0.4 P1.4 U3.3 U6.4 USB_H.1 V-C2.1 | length 145.3
  Top Layer w0.3: MK5P.5 5.745,-55.596 5.842,-55.499
  Top Layer w0.5: 5.842,-55.499 6.731,-54.61 6.731,-51.943 6.731,-45.585
  Top Layer w0.8: 6.731,-51.943 13.462,-51.943 13.984,-52.465 P1.4 ; 6.731,-45.966 6.731,-19.685 ; USB_H.1@11.216,-19.423 10.962,-19.423 USB_H.1 6.739,-19.677 5.588,-18.526 5.588,-16.002 16.115,-5.475 ; U3.3 16.115,-5.475 ; P0.4 19.535,-16.479 v3(19.939,-16.883) ; v5(26.162,-14.47) 26.162,-13.327 ; L1.2@42.799,-14.851 42.672,-14.851 36.195,-14.851 V-C2.1 34.986,-13.642 D_C2.1 D_C3.1 26.477,-13.642 26.162,-13.327 ; U6.4 45.878,-5.199 27.686,-5.199 ; 16.115,-5.475 16.129,-5.461 16.129,-5.199 ; 16.115,-5.475 16.115,-5.213 16.129,-5.199 ; 16.129,-5.199 27.686,-5.199 ; 26.162,-13.327 26.162,-6.723 27.686,-5.199
  Bottom Layer w0.8: v3(19.939,-16.883) 23.749,-16.883 v5(26.162,-14.47)
VIN: C12.1 F0.2 U6.7 V-C1.1 | length 22.4
  Top Layer w0.6: U6.7 51.714,-15.003 52.603,-15.892 56.109,-15.892 58.928,-13.073 C12.1
  Top Layer w1.2: C12.1 61.534,-14.216 V-C1.1
  Top Layer w1.5: V-C1.1 F0.2 F0.2@69.17,-14.216
pads on no net: bat.0 DB485.10 DB485.11 EGND0.1 EGND1.1 EGND2.1 EGND3.1 MK5P. MK5P.2 SD.10 SD.11 SD.12 SD.13 U0.2 U0.9 U0.10 U0.11 U0.16 U0.17 U0.20 U0.21 U0.22 U0.23 U0.24 U0.25 U0.26 U0.27 U0.28 U0.29 U0.30 U0.34 U0.50 U0.55 U0.56 U0.57 U0.58 U0.59 U0.61 U0.62 U4.7 U4.8 U4.9 U4.10 U6.2 U6.3 U6.5 USB_H.VSS USB_H.VSS2 Y0.
copper on no net:
  other v1: 14.478,-62.23 12.065,-61.333 10.033,-60.071 5.842,-59.817 56.134,-34.282 55.118,-34.028
  other v2: 2.602,-58.896 2.602,-54.896

## Polygon pours and split planes (outlines as drawn)
GND on Top Layer "Top Layer-No Net" (solid): 0,0 90,0 89.789,-0.211 89.789,-70.977 0.381,-70.977
GND on Bottom Layer "Top Layer-No Net" (solid): 0,0 89.662,0 90,-0.338 90,-70.358 1,-70.358 0.381,-70.977

## Keep-outs
Keep-Out Layer:
  lines w0.254: 0,-70.977 0,0 90,0 90,-70.977 0,-70.977

## Silkscreen, mask and mechanical layers (free items; w line width, h text height)
Top Overlay:
  drawing of 491 lines, arcs and shapes, not listed
  text "13688670331 v0.0.3" at 52.705,-66.159 h1.52

## Text inside footprints (layer, text, board x,y; h text height)
DB485: Top Overlay "6" at 86.525,-29.889 h1.5 r270; Top Overlay "9" at 86.525,-38.199 h1.5 r270; Top Overlay "5" at 79.562,-42.037 h1.5 r270; Top Overlay "1" at 79.562,-26.416 h1.5 r270
MK5P: Top Overlay "GND" at 4.469,-58.42 h0.4; Top Overlay "VCC" at 4.596,-55.753 h0.4; Top Overlay "D+" at 4.472,-57.046 h0.4; Top Overlay "D-" at 4.472,-56.496 h0.4
USB_H: Top Overlay "GND" at 9.438,-26.154 h1.2 r180; Top Overlay "VCC" at 9.565,-18.788 h1.2 r180; Top Overlay "D+" at 9.057,-23.868 h1.2 r180; Top Overlay "D-" at 9.057,-21.328 h1.2 r180
V-C1: Top Overlay "+" at 66.294,-12.946 h1.5 r90
V-C2: Top Overlay "+" at 37.846,-14.47 h1 r90